# EAGLE board Arm_V3 (EAGLE 9.6.2)
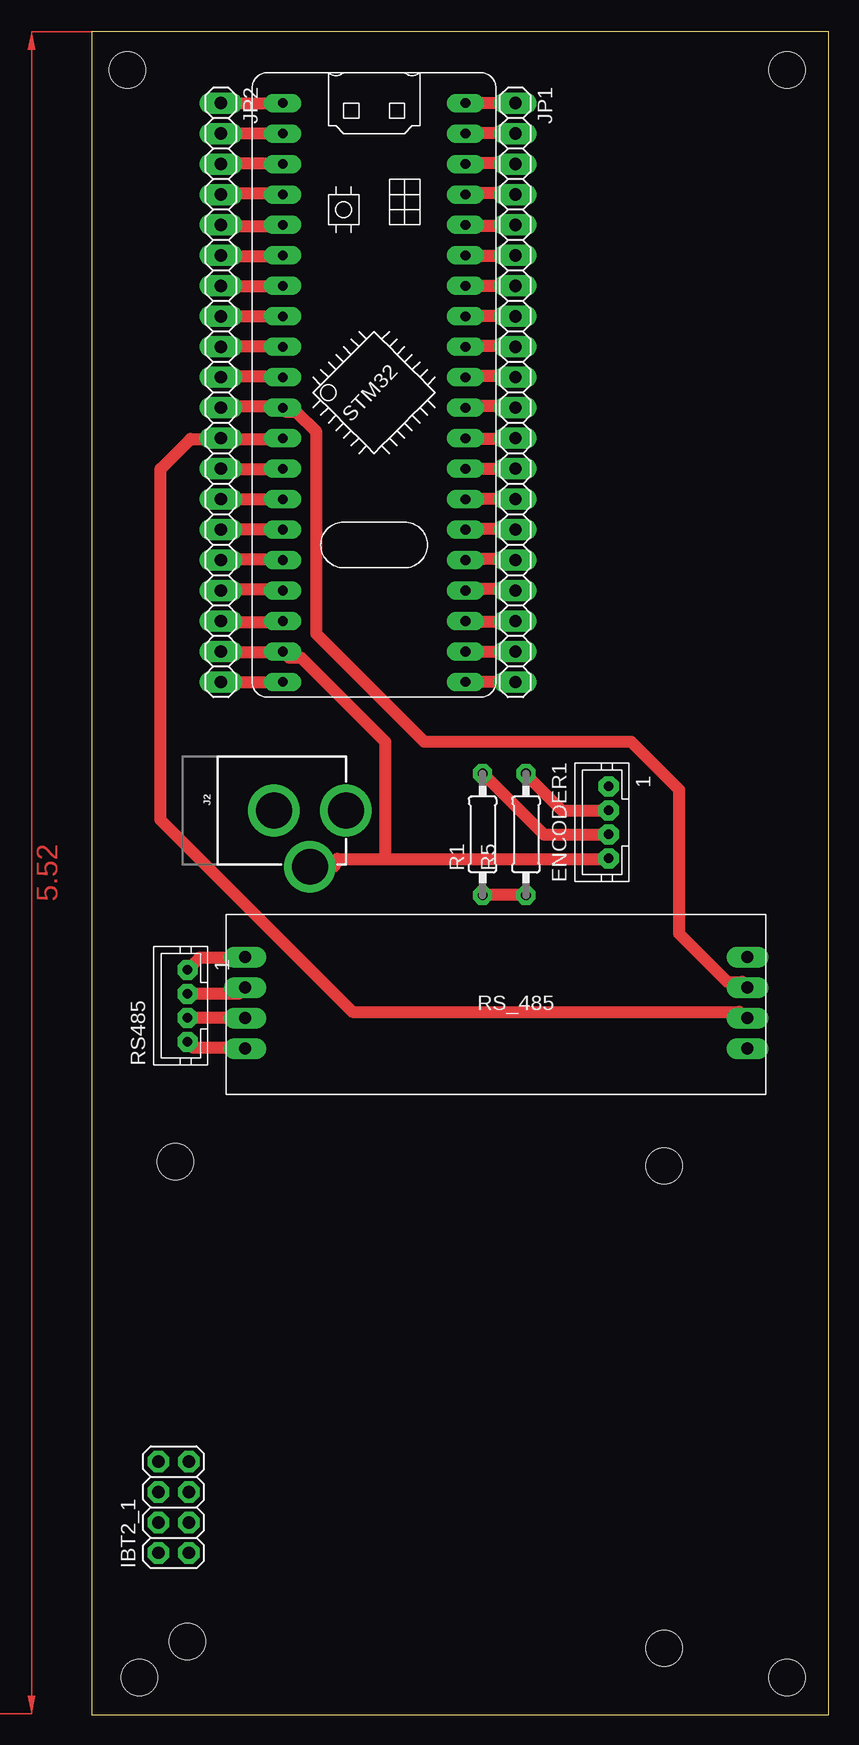
[diagram p0: board, top side]
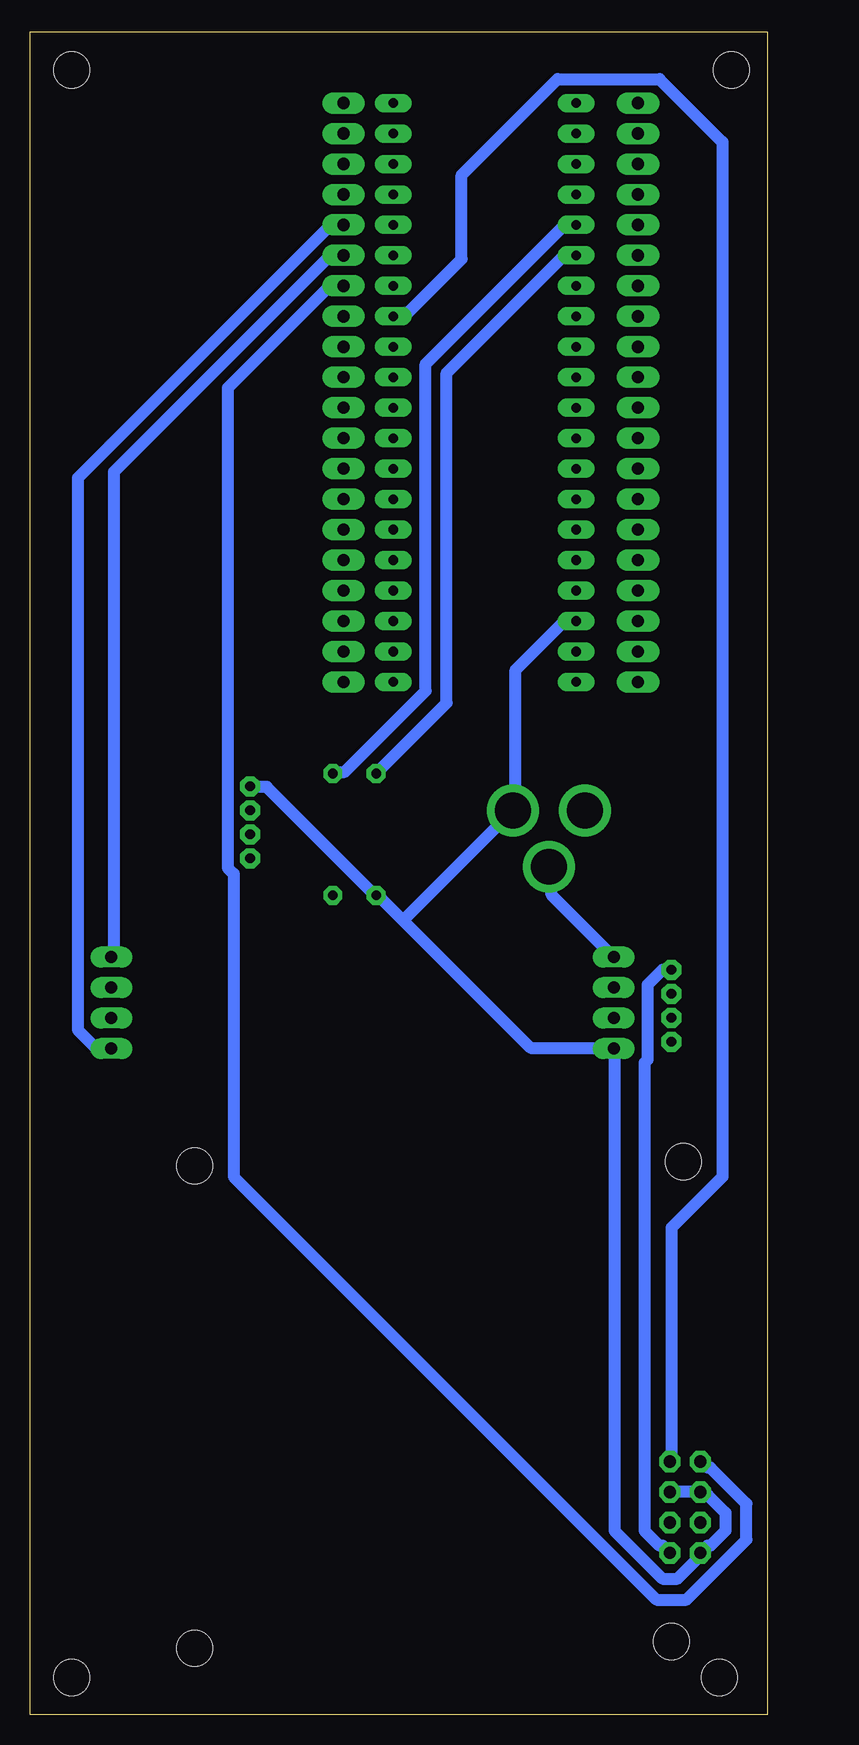
[diagram p1: board, bottom side, seen from below]

Size 61.48 x 140.29 mm. Coordinates in mm from the lower left corner, seen from the top.
Outline: 0,0 61.48,0 61.48,140.29 0,140.29 0,0
Copper layers (1*16): Top 0.035mm / dielectric 1.5mm / Bottom 0.035mm
Design rules "default *": minimum track width 40mil, minimum drill 0.35mm, track to track 20mil, track to pad 6mil, pad to pad 6mil, via to via 6mil, smd to smd 6mil, copper to edge 40mil, drill to drill 6mil, minimum pad ring 15mil, minimum via ring 15mil, stop-mask expansion 4mil, vias tented up to drill 0mil, thermal gap 10mil
Net classes: 0 default: width 1.016 mm, clearance 0.508 mm
Holes 3 mm at 47.75,45.73 47.75,5.53 7,46.08 3,137.08 8,6.08 58,137.08 58,3.08 4,3.08
tRestrict: area 7.5,5.5 to 47.8,45.7; area 4,12.1 to 7,22.1

## Footprints (pad centres in the part's own frame; a part is rotated, then mirrored left to right if it is on the bottom)
JST-PH4 = drill 0.813 pad 1.676 octagon: 1 3,0; 2 1,0; 3 -1,0; 4 -3,0
2X04 = drill 1.016 octagon: 1 -3.81,-1.27; 2 -3.81,1.27; 3 -1.27,-1.27; 4 -1.27,1.27; 5 1.27,-1.27; 6 1.27,1.27; 7 3.81,-1.27; 8 3.81,1.27
POWER_JACK = drill 2.997 pad 4.318: GND 0,7.7; GNDBREAK 4.7,10.7; PWR 0,13.7
1X20 = drill 1.016 long: 1 -24.13,0; 2 -21.59,0; 3 -19.05,0; 4 -16.51,0; 5 -13.97,0; 6 -11.43,0; 7 -8.89,0; 8 -6.35,0; 9 -3.81,0; 10 -1.27,0; 11 1.27,0; 12 3.81,0; 13 6.35,0; 14 8.89,0; 15 11.43,0; 16 13.97,0; 17 16.51,0; 18 19.05,0; 19 21.59,0; 20 24.13,0
0207/10 = drill 0.813 octagon: 1 -5.08,0; 2 5.08,0
BLUE_PILL = drill 0.8 long: P$1 -7.62,15.24; P$2 -7.62,12.7; P$3 -7.62,10.16; P$4 -7.62,7.62; P$5 -7.62,5.08; P$6 -7.62,2.54; P$7 -7.62,0; P$8 -7.62,-2.54; P$9 -7.62,-5.08; P$10 -7.62,-7.62; P$11 -7.62,-10.16; P$12 -7.62,-12.7; P$13 -7.62,-15.24; P$14 -7.62,-17.78; P$15 -7.62,-20.32; P$16 -7.62,-22.86; P$17 -7.62,-25.4; P$18 -7.62,-27.94; P$19 -7.62,-30.48; P$20 -7.62,-33.02; P$21 7.62,15.24; P$22 7.62,12.7; P$23 7.62,10.16; P$24 7.62,7.62; P$25 7.62,5.08; P$26 7.62,2.54; P$27 7.62,0; P$28 7.62,-2.54; P$29 7.62,-5.08; P$30 7.62,-7.62; P$31 7.62,-10.16; P$32 7.62,-12.7; P$33 7.62,-15.24; P$34 7.62,-17.78; P$35 7.62,-20.32; P$36 7.62,-22.86; P$37 7.62,-25.4; P$38 7.62,-27.94; P$39 7.62,-30.48; P$40 7.62,-33.02
RSS485PCB = drill 1 long: P$1 1.57,11.43; P$2 1.57,8.89; P$3 1.57,6.35; P$4 1.57,3.81; P$5 43.45,11.43; P$6 43.45,8.89; P$7 43.45,6.35; P$8 43.45,3.81

## Placement (x,y rotation side)
ENCODER1  [JST-PH4]  43.12,74.37 90 top
IBT2_1  [2X04]  6.85,17.28 90 top
J2  POWER_JACK  [POWER_JACK]  7.51,75.37 270 top
JP1  [1X20]  35.34,110.2 270 top
JP2  [1X20]  10.78,110.2 270 top
R1  [0207/10]  32.61,73.37 90 top
R5  [0207/10]  36.23,73.37 90 top
RS485  [JST-PH4]  8,59.08 90 top
U$1  [BLUE_PILL]  23.56,119.09 0 top
U$2  RS_485PCB  [RSS485PCB]  11.24,51.7 0 top

## Library data of the parts
ENCODER1 RS485 = jst-ph
IBT2_1 JP1 JP2 = pinhead
J2 = J-Generic-5.5mm-Barrel-Jack; DPN: CP-202A-ND; MPN: PJ-202A
R1 R5 = rcl; SPICEPREFIX: R
U$1 = BluePill
U$2 = RS_485PCB

## Nets
5V: ENCODER1.1 IBT2_1.2 IBT2_1.5 IBT2_1.6 J2.PWR JP2.18 R1.1 R5.1 RS485.4 U$1.P$18 U$2.P$4
GND: ENCODER1.4 IBT2_1.1 J2.GNDBREAK JP2.19 RS485.1 U$1.P$19 U$2.P$1
M1LPWM: IBT2_1.7 JP1.8 U$1.P$28
M1RPWM: IBT2_1.8 JP1.7 U$1.P$27
N$1: JP1.1 U$1.P$21
N$2: JP1.2 U$1.P$22
N$3: JP1.3 U$1.P$23
N$4: JP1.4 U$1.P$24
N$5: JP1.9 U$1.P$29
N$6: J2.GND
N$7: JP1.10 U$1.P$30
N$8: JP2.14 U$1.P$14
N$9: JP2.15 U$1.P$15
N$10: RS485.2 U$2.P$2
N$11: JP1.11 U$1.P$31
N$12: JP1.12 U$1.P$32
N$13: JP1.13 U$1.P$33
N$14: JP1.14 U$1.P$34
N$15: JP1.15 U$1.P$35
N$16: JP1.16 U$1.P$36
N$17: JP1.17 U$1.P$37
N$18: JP1.18 U$1.P$38
N$19: JP1.19 U$1.P$39
N$20: JP1.20 U$1.P$40
N$21: JP2.1 U$1.P$1
N$22: JP2.2 U$1.P$2
N$23: JP2.3 U$1.P$3
N$24: JP2.4 U$1.P$4
N$25: RS485.3 U$2.P$3
N$27: JP2.7 U$1.P$7
N$28: JP2.8 U$1.P$8
N$29: JP2.9 U$1.P$9
N$30: JP2.10 U$1.P$10
N$33: JP2.13 U$1.P$13
N$36: JP2.16 U$1.P$16
N$37: JP2.17 U$1.P$17
N$40: JP2.20 U$1.P$20
PA8: ENCODER1.2 JP2.5 R5.2 U$1.P$5
PA9: ENCODER1.3 JP2.6 R1.2 U$1.P$6
PB3: JP2.11 U$1.P$11 U$2.P$6
PB4: JP2.12 U$1.P$12 U$2.P$7
PB10: JP1.6 U$1.P$26 U$2.P$5
PB11: JP1.5 U$1.P$25 U$2.P$8

## Tracks (layer width: path | path; a pad name or v marks a point on that pad's centre or on a via)
5V
  Top 1.016: U$1.P$18 15.75,91.08 11,91.08 JP2.18 | RS485.4 8.5,55.58 12.75,55.58 U$2.P$4 | R1.1 32.75,68.33 36,68.33 R5.1
  Bottom 1.016: U$1.P$18 16,91.08 17,91.08 21,87.08 21,75.58 J2.PWR 30.38,66.2 | IBT2_1.5 8,18.58 6,18.58 IBT2_1.6 5.5,18.33 5,18.33 3.5,16.83 3.5,15.33 4.75,14.08 5,14.08 5.5,13.58 IBT2_1.2 5.75,13.08 7.5,11.33 8.75,11.33 12.75,15.33 12.75,55.08 U$2.P$4 13,55.58 19.75,55.58 30.38,66.2 | ENCODER1.1 43,77.33 41.75,77.33 32.75,68.33 R1.1 32.25,68.08 30.38,66.2
GND
  Top 1.016: JP2.19 11,88.58 15.75,88.58 U$1.P$19 16.25,88.33 16.5,88.08 17.5,88.08 24.5,81.08 24.5,71.33 | 24.5,71.33 20.5,71.33 20.21,70.67 J2.GNDBREAK | 24.5,71.33 43,71.33 ENCODER1.4 | RS485.1 9,63.08 12.75,63.08 U$2.P$1
  Bottom 1.016: RS485.1 8.75,62.08 10,60.83 10,54.58 10.25,54.33 10.25,15.33 9,14.08 8.75,14.08 8.25,13.58 IBT2_1.1 | J2.GNDBREAK 18,70.58 18,68.33 13,63.33 U$2.P$1
M1LPWM
  Top 1.016: U$1.P$28 31.25,116.58 35.25,116.58 JP1.8
  Bottom 1.016: IBT2_1.7 8,21.33 8,40.58 3.75,44.83 3.75,131.08 9,136.33 17.5,136.33 25.5,128.33 25.5,121.33 30.25,116.58 31,116.58 U$1.P$28
M1RPWM
  Top 1.016: U$1.P$27 31.25,119.08 35.25,119.08 JP1.7
  Bottom 1.016: IBT2_1.8 5.5,21.08 5,20.58 4.75,20.58 1.75,17.58 1.75,14.58 6.75,9.58 9.25,9.58 44.5,44.83 44.5,70.08 45,70.58 45,110.58 36.5,119.08 35.5,119.08 JP1.7
N$1
  Top 1.016: JP1.1 U$1.P$21
N$2
  Top 1.016: U$1.P$22 31.25,131.83 35.25,131.83 JP1.2
N$3
  Top 1.016: U$1.P$23 31.25,129.33 35.25,129.33 JP1.3
N$4
  Top 1.016: U$1.P$24 31.25,126.83 35.25,126.83 JP1.4
N$5
  Top 1.016: U$1.P$29 31.25,114.08 35.25,114.08 JP1.9
N$7
  Top 1.016: U$1.P$30 31.25,111.58 35.25,111.58 JP1.10
N$8
  Top 1.016: U$1.P$14 15.75,101.33 11,101.33 JP2.14
N$9
  Top 1.016: U$1.P$15 15.75,98.83 11,98.83 JP2.15
N$10
  Top 1.016: RS485.2 12.25,60.08 12.75,60.58 U$2.P$2
N$11
  Top 1.016: U$1.P$31 31.25,109.08 35.25,109.08 JP1.11
N$12
  Top 1.016: U$1.P$32 31.25,106.33 35.25,106.33 JP1.12
N$13
  Top 1.016: U$1.P$33 31.25,103.83 35.25,103.83 JP1.13
N$14
  Top 1.016: U$1.P$34 31.25,101.33 35.25,101.33 JP1.14
N$15
  Top 1.016: U$1.P$35 31.25,98.83 35.25,98.83 JP1.15
N$16
  Top 1.016: U$1.P$36 31.25,96.33 35.25,96.33 JP1.16
N$17
  Top 1.016: U$1.P$37 31.25,93.83 35.25,93.83 JP1.17
N$18
  Top 1.016: U$1.P$38 31.25,91.08 35.25,91.08 JP1.18
N$19
  Top 1.016: U$1.P$39 31.25,88.58 35.25,88.58 JP1.19
N$20
  Top 1.016: U$1.P$40 31.25,86.08 35.25,86.08 JP1.20
N$21
  Top 1.016: JP2.1 U$1.P$1
N$22
  Top 1.016: U$1.P$2 15.75,131.83 11,131.83 JP2.2
N$23
  Top 1.016: U$1.P$3 15.75,129.33 11,129.33 JP2.3
N$24
  Top 1.016: U$1.P$4 15.75,126.83 11,126.83 JP2.4
N$25
  Top 1.016: RS485.3 12.75,58.08 U$2.P$3
N$27
  Top 1.016: U$1.P$7 15.75,119.08 11,119.08 JP2.7
N$28
  Top 1.016: U$1.P$8 15.75,116.58 11,116.58 JP2.8
N$29
  Top 1.016: U$1.P$9 15.75,114.08 11,114.08 JP2.9
N$30
  Top 1.016: U$1.P$10 15.75,111.58 11,111.58 JP2.10
N$33
  Top 1.016: U$1.P$13 15.75,103.83 11,103.83 JP2.13
N$36
  Top 1.016: U$1.P$16 15.75,96.33 11,96.33 JP2.16
N$37
  Top 1.016: U$1.P$17 15.75,93.83 11,93.83 JP2.17
N$40
  Top 1.016: U$1.P$20 15.75,86.08 11,86.08 JP2.20
PA8
  Top 1.016: U$1.P$5 15.75,124.08 11,124.08 JP2.5 | R5.2 36.25,78.33 39.25,75.33 43,75.33 ENCODER1.2
  Bottom 1.016: U$1.P$5 16,124.08 17,124.08 28.5,112.58 28.5,85.33 35.25,78.58 36,78.58 R5.2
PA9
  Top 1.016: U$1.P$6 15.75,121.58 11,121.58 JP2.6 | R1.2 32.75,78.33 37.75,73.33 43,73.33 ENCODER1.3
  Bottom 1.016: U$1.P$6 16,121.58 17,121.58 26.75,111.83 26.75,84.33 32.5,78.58 R1.2
PB3
  Top 1.016: JP2.11 11,109.08 15.75,109.08 U$1.P$11 16.25,108.58 17.07,108.58 18.75,106.9 18.75,90.08 27.75,81.08 45,81.08 49,77.08 49,65.08 53,61.08 54.25,61.08 54.5,60.83 U$2.P$6
PB4
  Top 1.016: 11,106.33 15.75,106.33 U$1.P$12 | 11,106.33 JP2.12 10.25,106.33 | U$2.P$7 54.5,58.08 54,58.58 21.75,58.58 5.75,74.58 5.75,103.83 8.25,106.33 11,106.33
PB10
  Top 1.016: U$1.P$26 31.25,121.58 35.25,121.58 JP1.6
  Bottom 1.016: U$2.P$5 54.5,63.33 54.5,103.58 36.5,121.58 35.5,121.58 JP1.6
PB11
  Top 1.016: U$1.P$25 31.25,124.08 35.25,124.08 JP1.5
  Bottom 1.016: U$2.P$8 54.75,55.58 56,55.58 57.5,57.08 57.5,103.08 36.5,124.08 35.5,124.08 JP1.5
(copper drawn outside any net)
  shapes: Top area x2

## Text on the board
tDocu: Shafayet Sadik Sowad | Safwan Sami | Fabbiha Bushra